# EAGLE board MyDoorSensorpanelized (EAGLE 7.5.0), part 1 of 3
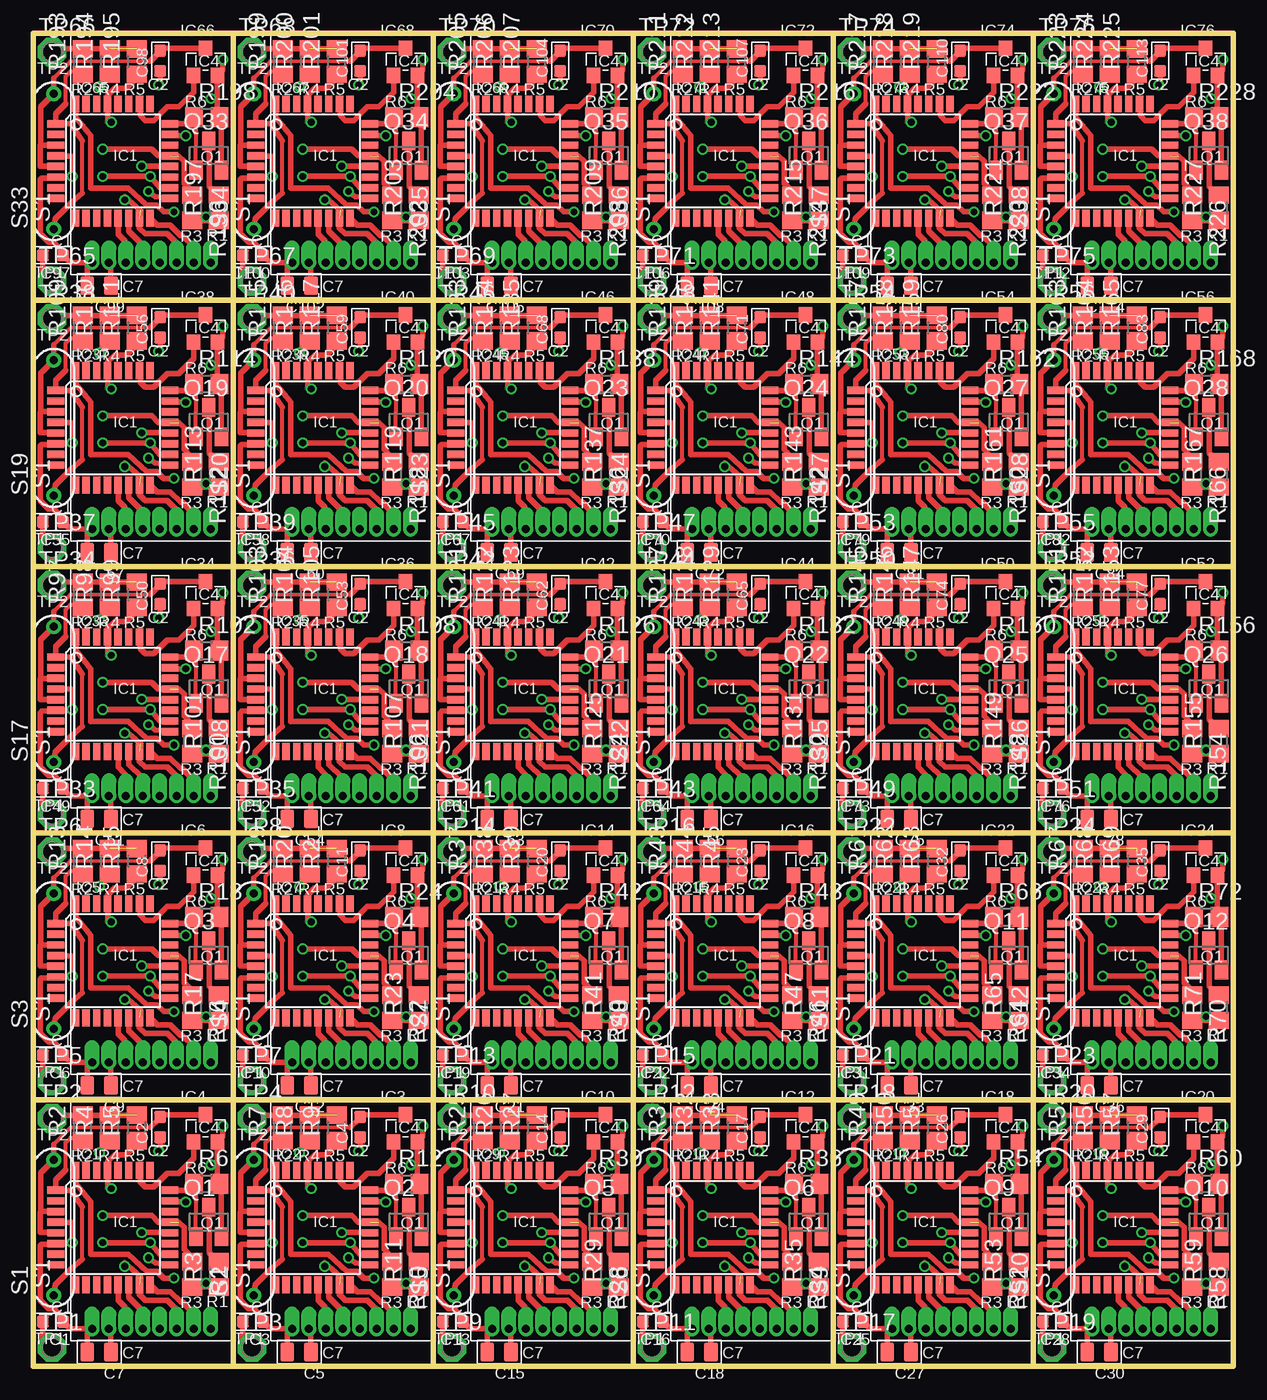
[diagram p0: board, top side]
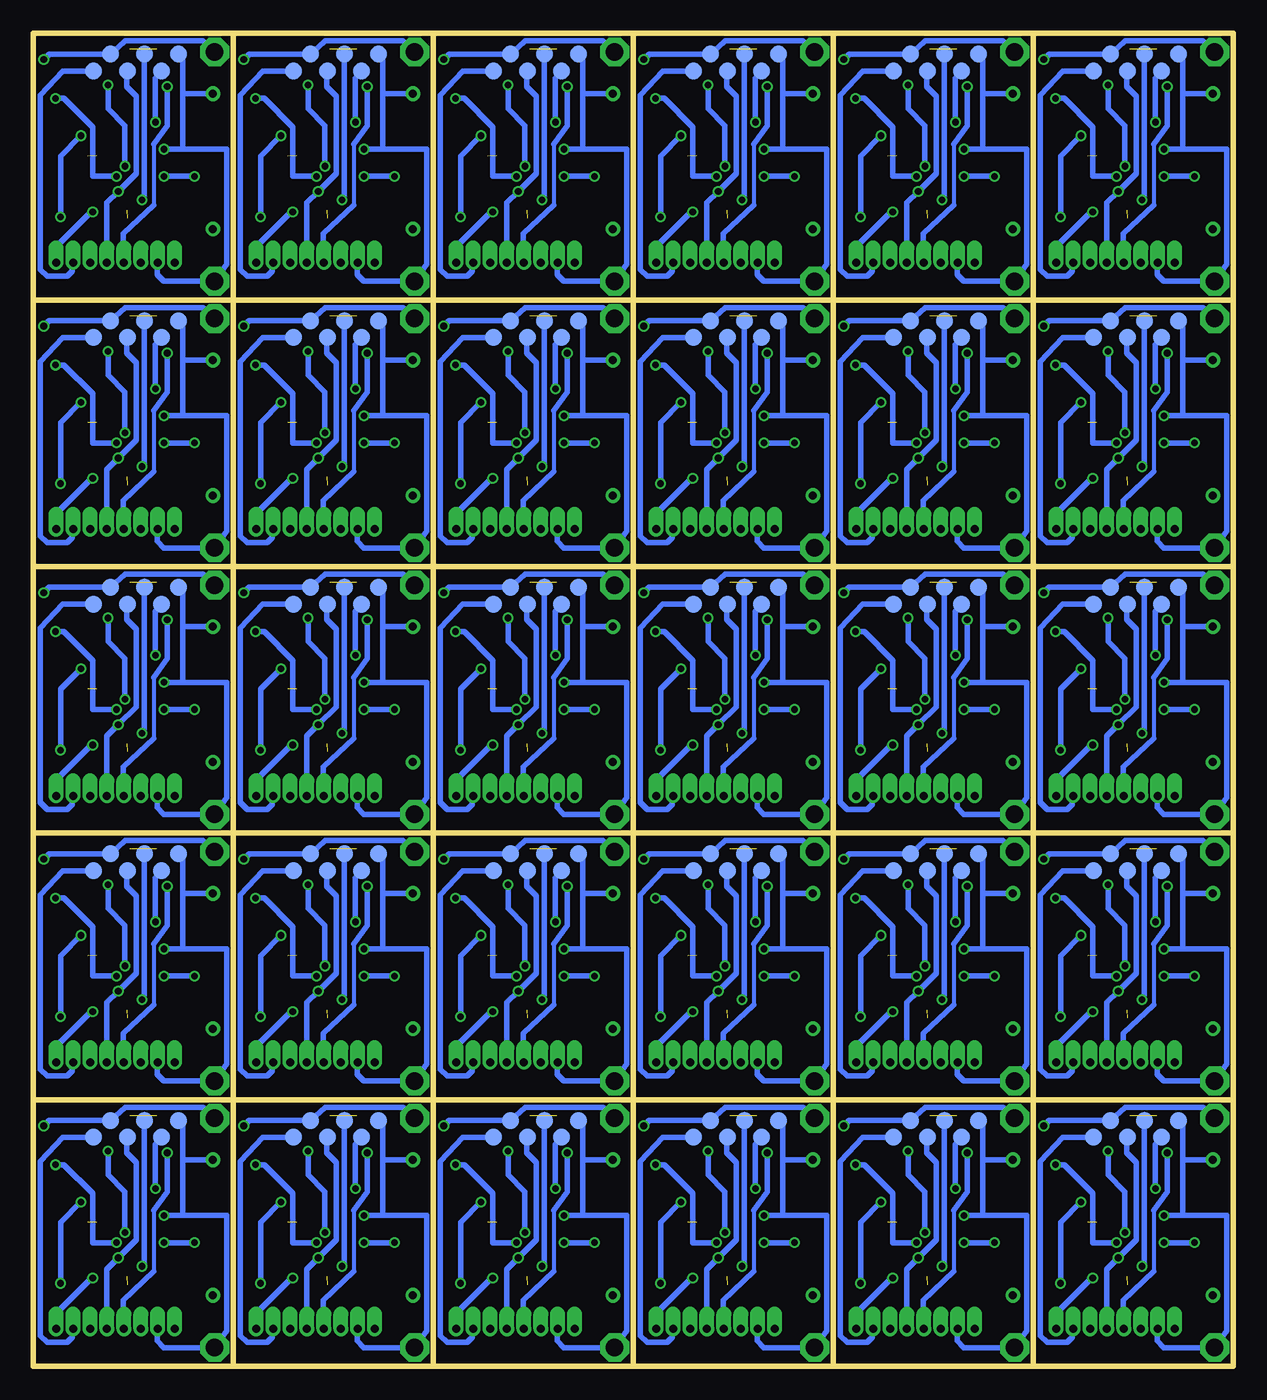
[diagram p1: board, bottom side, seen from below]

Size 90 x 100 mm. Coordinates in mm from the lower left corner, seen from the top.
Outline: 0,0 90,0 90,100 0,100 0,0
Copper layers (1*16): Top 0.035mm / dielectric 1.5mm / Bottom 0.035mm
Design rules "ITEADstudioDRC": minimum track width 6mil, minimum drill 12mil, track to track 6mil, track to pad 6mil, pad to pad 6mil, via to via 6mil, smd to smd 0mil, copper to edge 10mil, drill to drill 10mil, minimum pad ring 10mil, minimum via ring 6mil, stop-mask expansion 2mil, vias tented up to drill 100mil, thermal gap 10mil
Net classes: 0 default: width 0.203 mm; 1 Power: width 0.406 mm
Milling: 71 lines

## Footprints (pad centres in the part's own frame; a part is rotated, then mirrored left to right if it is on the bottom)
C0603 = smd 0.889 x 0.889: 1 -0.762,0; 2 0.762,0
C0805 = smd 1.016 x 1.397: 1 -0.889,0; 2 0.889,0
TQFP32-08 = smd 1.27 x 0.559: 1 -4.293,2.8; 2 -4.293,2; 3 -4.293,1.2; 4 -4.293,0.4; 5 -4.293,-0.4; 6 -4.293,-1.2; 7 -4.293,-2; 8 -4.293,-2.8; 17 4.293,-2.8; 18 4.293,-2; 19 4.293,-1.2; 20 4.293,-0.4; 21 4.293,0.4; 22 4.293,1.2; 23 4.293,2; 24 4.293,2.8 | smd 0.559 x 1.27: 9 -2.8,-4.293; 10 -2,-4.293; 11 -1.2,-4.293; 12 -0.4,-4.293; 13 0.4,-4.293; 14 1.2,-4.293; 15 2,-4.293; 16 2.8,-4.293; 25 2.8,4.293; 26 2,4.293; 27 1.2,4.293; 28 0.4,4.293; 29 -0.4,4.293; 30 -1.2,4.293; 31 -2,4.293; 32 -2.8,4.293
SOT23 = smd 1.016 x 1.143: 1 -0.889,-1.016; 2 0.889,-1.016; 3 0,1.016
SOT23' = smd 1 x 1.4: 1 -0.95,-1.1; 2 0.95,-1.1; 3 0,1.1
R0805 = smd 1.3 x 1.5: 1 -0.95,0; 2 0.95,0
MK6-4 = drill 0.6 pad 1.016: 1 -5.08,0; 2 5.08,0
P1-13 = drill 1.321 pad 2.159 octagon: TP 0,0
PINHD-1X08/NRF24 = drill 0.6 offset: P$1 0,0; P$2 1.27,0; P$3 2.54,0; P$4 3.81,0; P$5 5.08,0; P$6 6.35,0; P$7 7.62,0; P$8 8.89,0
ISP = smd 1.27 x 1.27: P$1 0,0; P$2 1.27,1.27; P$3 2.54,0; P$4 3.81,1.27; P$5 5.08,0; P$6 6.35,1.27

## Placement (x,y rotation side)
C1  100n  [C0603]  1.48,3.34 180 top
C2  100n  [C0603]  9.51,17.94 90 top
C3  100n  [C0603]  16.48,3.34 180 top
C4  100n  [C0603]  24.51,17.94 90 top
C5  4u7  [C0805]  19.93,1.06 180 top
C6  100n  [C0603]  1.48,23.34 180 top
C7  4u7  [C0805]  4.93,1.06 180 top
C8  100n  [C0603]  9.51,37.94 90 top
C9  4u7  [C0805]  4.93,21.06 180 top
C10  100n  [C0603]  16.48,23.34 180 top
C11  100n  [C0603]  24.51,37.94 90 top
C12  4u7  [C0805]  19.93,21.06 180 top
C13  100n  [C0603]  31.48,3.34 180 top
C14  100n  [C0603]  39.51,17.94 90 top
C15  4u7  [C0805]  34.93,1.06 180 top
C16  100n  [C0603]  46.48,3.34 180 top
C17  100n  [C0603]  54.51,17.94 90 top
C18  4u7  [C0805]  49.93,1.06 180 top
C19  100n  [C0603]  31.48,23.34 180 top
C20  100n  [C0603]  39.51,37.94 90 top
C21  4u7  [C0805]  34.93,21.06 180 top
C22  100n  [C0603]  46.48,23.34 180 top
C23  100n  [C0603]  54.51,37.94 90 top
C24  4u7  [C0805]  49.93,21.06 180 top
C25  100n  [C0603]  61.48,3.34 180 top
C26  100n  [C0603]  69.51,17.94 90 top
C27  4u7  [C0805]  64.93,1.06 180 top
C28  100n  [C0603]  76.48,3.34 180 top
C29  100n  [C0603]  84.51,17.94 90 top
C30  4u7  [C0805]  79.93,1.06 180 top
C31  100n  [C0603]  61.48,23.34 180 top
C32  100n  [C0603]  69.51,37.94 90 top
C33  4u7  [C0805]  64.93,21.06 180 top
C34  100n  [C0603]  76.48,23.34 180 top
C35  100n  [C0603]  84.51,37.94 90 top
C36  4u7  [C0805]  79.93,21.06 180 top
C49  100n  [C0603]  1.48,43.34 180 top
C50  100n  [C0603]  9.51,57.94 90 top
C51  4u7  [C0805]  4.93,41.06 180 top
C52  100n  [C0603]  16.48,43.34 180 top
C53  100n  [C0603]  24.51,57.94 90 top
C54  4u7  [C0805]  19.93,41.06 180 top
C55  100n  [C0603]  1.48,63.34 180 top
C56  100n  [C0603]  9.51,77.94 90 top
C57  4u7  [C0805]  4.93,61.06 180 top
C58  100n  [C0603]  16.48,63.34 180 top
C59  100n  [C0603]  24.51,77.94 90 top
C60  4u7  [C0805]  19.93,61.06 180 top
C61  100n  [C0603]  31.48,43.34 180 top
C62  100n  [C0603]  39.51,57.94 90 top
C63  4u7  [C0805]  34.93,41.06 180 top
C64  100n  [C0603]  46.48,43.34 180 top
C65  100n  [C0603]  54.51,57.94 90 top
C66  4u7  [C0805]  49.93,41.06 180 top
C67  100n  [C0603]  31.48,63.34 180 top
C68  100n  [C0603]  39.51,77.94 90 top
C69  4u7  [C0805]  34.93,61.06 180 top
C70  100n  [C0603]  46.48,63.34 180 top
C71  100n  [C0603]  54.51,77.94 90 top
C72  4u7  [C0805]  49.93,61.06 180 top
C73  100n  [C0603]  61.48,43.34 180 top
C74  100n  [C0603]  69.51,57.94 90 top
C75  4u7  [C0805]  64.93,41.06 180 top
C76  100n  [C0603]  76.48,43.34 180 top
C77  100n  [C0603]  84.51,57.94 90 top
C78  4u7  [C0805]  79.93,41.06 180 top
C79  100n  [C0603]  61.48,63.34 180 top
C80  100n  [C0603]  69.51,77.94 90 top
C81  4u7  [C0805]  64.93,61.06 180 top
C82  100n  [C0603]  76.48,63.34 180 top
C83  100n  [C0603]  84.51,77.94 90 top
C84  4u7  [C0805]  79.93,61.06 180 top
C97  100n  [C0603]  1.48,83.34 180 top
C98  100n  [C0603]  9.51,97.94 90 top
C99  4u7  [C0805]  4.93,81.06 180 top
C100  100n  [C0603]  16.48,83.34 180 top
C101  100n  [C0603]  24.51,97.94 90 top
C102  4u7  [C0805]  19.93,81.06 180 top
C103  100n  [C0603]  31.48,83.34 180 top
C104  100n  [C0603]  39.51,97.94 90 top
C105  4u7  [C0805]  34.93,81.06 180 top
C106  100n  [C0603]  46.48,83.34 180 top
C107  100n  [C0603]  54.51,97.94 90 top
C108  4u7  [C0805]  49.93,81.06 180 top
C109  100n  [C0603]  61.48,83.34 180 top
C110  100n  [C0603]  69.51,97.94 90 top
C111  4u7  [C0805]  64.93,81.06 180 top
C112  100n  [C0603]  76.48,83.34 180 top
C113  100n  [C0603]  84.51,97.94 90 top
C114  4u7  [C0805]  79.93,81.06 180 top
IC1  MEGA328P-AU  [TQFP32-08]  5.96,10.41 0 top
IC2  MEGA328P-AU  [TQFP32-08]  20.96,10.41 0 top
IC3  ATSHA204A  [SOT23]  27.91,17.86 0 top
IC4  ATSHA204A  [SOT23]  12.91,17.86 0 top
IC5  MEGA328P-AU  [TQFP32-08]  5.96,30.41 0 top
IC6  ATSHA204A  [SOT23]  12.91,37.86 0 top
IC7  MEGA328P-AU  [TQFP32-08]  20.96,30.41 0 top
IC8  ATSHA204A  [SOT23]  27.91,37.86 0 top
IC9  MEGA328P-AU  [TQFP32-08]  35.96,10.41 0 top
IC10  ATSHA204A  [SOT23]  42.91,17.86 0 top
IC11  MEGA328P-AU  [TQFP32-08]  50.96,10.41 0 top
IC12  ATSHA204A  [SOT23]  57.91,17.86 0 top
IC13  MEGA328P-AU  [TQFP32-08]  35.96,30.41 0 top
IC14  ATSHA204A  [SOT23]  42.91,37.86 0 top
IC15  MEGA328P-AU  [TQFP32-08]  50.96,30.41 0 top
IC16  ATSHA204A  [SOT23]  57.91,37.86 0 top
IC17  MEGA328P-AU  [TQFP32-08]  65.96,10.41 0 top
IC18  ATSHA204A  [SOT23]  72.92,17.86 0 top
IC19  MEGA328P-AU  [TQFP32-08]  80.96,10.41 0 top
IC20  ATSHA204A  [SOT23]  87.92,17.86 0 top
IC21  MEGA328P-AU  [TQFP32-08]  65.96,30.41 0 top
IC22  ATSHA204A  [SOT23]  72.92,37.86 0 top
IC23  MEGA328P-AU  [TQFP32-08]  80.96,30.41 0 top
IC24  ATSHA204A  [SOT23]  87.92,37.86 0 top
IC33  MEGA328P-AU  [TQFP32-08]  5.96,50.41 0 top
IC34  ATSHA204A  [SOT23]  12.91,57.86 0 top
IC35  MEGA328P-AU  [TQFP32-08]  20.96,50.41 0 top
IC36  ATSHA204A  [SOT23]  27.91,57.86 0 top
IC37  MEGA328P-AU  [TQFP32-08]  5.96,70.41 0 top
IC38  ATSHA204A  [SOT23]  12.91,77.86 0 top
IC39  MEGA328P-AU  [TQFP32-08]  20.96,70.41 0 top
IC40  ATSHA204A  [SOT23]  27.91,77.86 0 top
IC41  MEGA328P-AU  [TQFP32-08]  35.96,50.41 0 top
IC42  ATSHA204A  [SOT23]  42.91,57.86 0 top
IC43  MEGA328P-AU  [TQFP32-08]  50.96,50.41 0 top
IC44  ATSHA204A  [SOT23]  57.91,57.86 0 top
IC45  MEGA328P-AU  [TQFP32-08]  35.96,70.41 0 top
IC46  ATSHA204A  [SOT23]  42.91,77.86 0 top
IC47  MEGA328P-AU  [TQFP32-08]  50.96,70.41 0 top
IC48  ATSHA204A  [SOT23]  57.91,77.86 0 top
IC49  MEGA328P-AU  [TQFP32-08]  65.96,50.41 0 top
IC50  ATSHA204A  [SOT23]  72.92,57.86 0 top
IC51  MEGA328P-AU  [TQFP32-08]  80.96,50.41 0 top
IC52  ATSHA204A  [SOT23]  87.92,57.86 0 top
IC53  MEGA328P-AU  [TQFP32-08]  65.96,70.41 0 top
IC54  ATSHA204A  [SOT23]  72.92,77.86 0 top
IC55  MEGA328P-AU  [TQFP32-08]  80.96,70.41 0 top
IC56  ATSHA204A  [SOT23]  87.92,77.86 0 top
IC65  MEGA328P-AU  [TQFP32-08]  5.96,90.41 0 top
IC66  ATSHA204A  [SOT23]  12.91,97.86 0 top
IC67  MEGA328P-AU  [TQFP32-08]  20.96,90.41 0 top
IC68  ATSHA204A  [SOT23]  27.91,97.86 0 top
IC69  MEGA328P-AU  [TQFP32-08]  35.96,90.41 0 top
IC70  ATSHA204A  [SOT23]  42.91,97.86 0 top
IC71  MEGA328P-AU  [TQFP32-08]  50.96,90.41 0 top
IC72  ATSHA204A  [SOT23]  57.91,97.86 0 top
IC73  MEGA328P-AU  [TQFP32-08]  65.96,90.41 0 top
IC74  ATSHA204A  [SOT23]  72.92,97.86 0 top
IC75  MEGA328P-AU  [TQFP32-08]  80.96,90.41 0 top
IC76  ATSHA204A  [SOT23]  87.92,97.86 0 top
Q1  BSS84  [SOT23']  13.15,10.83 0 top
Q2  BSS84  [SOT23']  28.15,10.83 0 top
Q3  BSS84  [SOT23']  13.15,30.83 0 top
Q4  BSS84  [SOT23']  28.15,30.83 0 top
Q5  BSS84  [SOT23']  43.15,10.83 0 top
Q6  BSS84  [SOT23']  58.15,10.83 0 top
Q7  BSS84  [SOT23']  43.15,30.83 0 top
Q8  BSS84  [SOT23']  58.15,30.83 0 top
Q9  BSS84  [SOT23']  73.15,10.83 0 top
Q10  BSS84  [SOT23']  88.15,10.83 0 top
Q11  BSS84  [SOT23']  73.15,30.83 0 top
Q12  BSS84  [SOT23']  88.15,30.83 0 top
Q17  BSS84  [SOT23']  13.15,50.83 0 top
Q18  BSS84  [SOT23']  28.15,50.83 0 top
Q19  BSS84  [SOT23']  13.15,70.83 0 top
Q20  BSS84  [SOT23']  28.15,70.83 0 top
Q21  BSS84  [SOT23']  43.15,50.83 0 top
Q22  BSS84  [SOT23']  58.15,50.83 0 top
Q23  BSS84  [SOT23']  43.15,70.83 0 top
Q24  BSS84  [SOT23']  58.15,70.83 0 top
Q25  BSS84  [SOT23']  73.15,50.83 0 top
Q26  BSS84  [SOT23']  88.15,50.83 0 top
Q27  BSS84  [SOT23']  73.15,70.83 0 top
Q28  BSS84  [SOT23']  88.15,70.83 0 top
Q33  BSS84  [SOT23']  13.15,90.83 0 top
Q34  BSS84  [SOT23']  28.15,90.83 0 top
Q35  BSS84  [SOT23']  43.15,90.83 0 top
Q36  BSS84  [SOT23']  58.15,90.83 0 top
Q37  BSS84  [SOT23']  73.15,90.83 0 top
Q38  BSS84  [SOT23']  88.15,90.83 0 top
R1  1k  [R0805]  11.93,6.9 270 top
R2  1M  [R0805]  3.7,17.89 90 top
R3  2k2  [R0805]  13.9,6.9 90 top
R4  56k  [R0805]  5.73,17.89 90 top
R5  10k  [R0805]  7.77,17.89 90 top
R6  100k  [R0805]  13,13.7 0 top
R7  1M  [R0805]  18.7,17.89 90 top
R8  56k  [R0805]  20.73,17.89 90 top
R9  10k  [R0805]  22.77,17.89 90 top
R10  1k  [R0805]  26.93,6.9 270 top
R11  2k2  [R0805]  28.9,6.9 90 top
R12  100k  [R0805]  28,13.7 0 top
R13  1M  [R0805]  3.7,37.89 90 top
R14  56k  [R0805]  5.73,37.89 90 top
R15  10k  [R0805]  7.77,37.89 90 top
R16  1k  [R0805]  11.93,26.9 270 top
R17  2k2  [R0805]  13.9,26.9 90 top
R18  100k  [R0805]  13,33.7 0 top
R19  1M  [R0805]  18.7,37.89 90 top
R20  56k  [R0805]  20.73,37.89 90 top
R21  10k  [R0805]  22.77,37.89 90 top
R22  1k  [R0805]  26.93,26.9 270 top
R23  2k2  [R0805]  28.9,26.9 90 top
R24  100k  [R0805]  28,33.7 0 top
R25  1M  [R0805]  33.7,17.89 90 top
R26  56k  [R0805]  35.73,17.89 90 top
R27  10k  [R0805]  37.77,17.89 90 top
R28  1k  [R0805]  41.93,6.9 270 top
R29  2k2  [R0805]  43.9,6.9 90 top
R30  100k  [R0805]  43,13.7 0 top
R31  1M  [R0805]  48.7,17.89 90 top
R32  56k  [R0805]  50.73,17.89 90 top
R33  10k  [R0805]  52.77,17.89 90 top
R34  1k  [R0805]  56.93,6.9 270 top
R35  2k2  [R0805]  58.9,6.9 90 top
R36  100k  [R0805]  58,13.7 0 top
R37  1M  [R0805]  33.7,37.89 90 top
R38  56k  [R0805]  35.73,37.89 90 top
R39  10k  [R0805]  37.77,37.89 90 top
R40  1k  [R0805]  41.93,26.9 270 top
R41  2k2  [R0805]  43.9,26.9 90 top
R42  100k  [R0805]  43,33.7 0 top
R43  1M  [R0805]  48.7,37.89 90 top
R44  56k  [R0805]  50.73,37.89 90 top
R45  10k  [R0805]  52.77,37.89 90 top
R46  1k  [R0805]  56.93,26.9 270 top
R47  2k2  [R0805]  58.9,26.9 90 top
R48  100k  [R0805]  58,33.7 0 top
R49  1M  [R0805]  63.7,17.89 90 top
R50  56k  [R0805]  65.73,17.89 90 top
R51  10k  [R0805]  67.77,17.89 90 top
R52  1k  [R0805]  71.93,6.9 270 top
R53  2k2  [R0805]  73.9,6.9 90 top
R54  100k  [R0805]  73,13.7 0 top
R55  1M  [R0805]  78.7,17.89 90 top
R56  56k  [R0805]  80.73,17.89 90 top
R57  10k  [R0805]  82.77,17.89 90 top
R58  1k  [R0805]  86.93,6.9 270 top
R59  2k2  [R0805]  88.9,6.9 90 top
R60  100k  [R0805]  88,13.7 0 top
R61  1M  [R0805]  63.7,37.89 90 top
R62  56k  [R0805]  65.73,37.89 90 top
R63  10k  [R0805]  67.77,37.89 90 top
R64  1k  [R0805]  71.93,26.9 270 top
R65  2k2  [R0805]  73.9,26.9 90 top
R66  100k  [R0805]  73,33.7 0 top
R67  1M  [R0805]  78.7,37.89 90 top
R68  56k  [R0805]  80.73,37.89 90 top
R69  10k  [R0805]  82.77,37.89 90 top
R70  1k  [R0805]  86.93,26.9 270 top
R71  2k2  [R0805]  88.9,26.9 90 top
R72  100k  [R0805]  88,33.7 0 top
R97  1M  [R0805]  3.7,57.89 90 top
R98  56k  [R0805]  5.73,57.89 90 top
R99  10k  [R0805]  7.77,57.89 90 top
R100  1k  [R0805]  11.93,46.9 270 top
R101  2k2  [R0805]  13.9,46.9 90 top
R102  100k  [R0805]  13,53.7 0 top
R103  1M  [R0805]  18.7,57.89 90 top
R104  56k  [R0805]  20.73,57.89 90 top
R105  10k  [R0805]  22.77,57.89 90 top
R106  1k  [R0805]  26.93,46.9 270 top
R107  2k2  [R0805]  28.9,46.9 90 top
R108  100k  [R0805]  28,53.7 0 top
R109  1M  [R0805]  3.7,77.89 90 top
R110  56k  [R0805]  5.73,77.89 90 top
R111  10k  [R0805]  7.77,77.89 90 top
R112  1k  [R0805]  11.93,66.9 270 top
R113  2k2  [R0805]  13.9,66.9 90 top
R114  100k  [R0805]  13,73.7 0 top
R115  1M  [R0805]  18.7,77.89 90 top
R116  56k  [R0805]  20.73,77.89 90 top
R117  10k  [R0805]  22.77,77.89 90 top
R118  1k  [R0805]  26.93,66.9 270 top
R119  2k2  [R0805]  28.9,66.9 90 top
R120  100k  [R0805]  28,73.7 0 top
R121  1M  [R0805]  33.7,57.89 90 top
R122  56k  [R0805]  35.73,57.89 90 top
R123  10k  [R0805]  37.77,57.89 90 top
R124  1k  [R0805]  41.93,46.9 270 top
R125  2k2  [R0805]  43.9,46.9 90 top
R126  100k  [R0805]  43,53.7 0 top
R127  1M  [R0805]  48.7,57.89 90 top
R128  56k  [R0805]  50.73,57.89 90 top
R129  10k  [R0805]  52.77,57.89 90 top
R130  1k  [R0805]  56.93,46.9 270 top
R131  2k2  [R0805]  58.9,46.9 90 top
R132  100k  [R0805]  58,53.7 0 top
R133  1M  [R0805]  33.7,77.89 90 top
R134  56k  [R0805]  35.73,77.89 90 top
R135  10k  [R0805]  37.77,77.89 90 top
R136  1k  [R0805]  41.93,66.9 270 top
R137  2k2  [R0805]  43.9,66.9 90 top
R138  100k  [R0805]  43,73.7 0 top
R139  1M  [R0805]  48.7,77.89 90 top
R140  56k  [R0805]  50.73,77.89 90 top
R141  10k  [R0805]  52.77,77.89 90 top
R142  1k  [R0805]  56.93,66.9 270 top
R143  2k2  [R0805]  58.9,66.9 90 top
R144  100k  [R0805]  58,73.7 0 top
R145  1M  [R0805]  63.7,57.89 90 top
R146  56k  [R0805]  65.73,57.89 90 top
R147  10k  [R0805]  67.77,57.89 90 top
R148  1k  [R0805]  71.93,46.9 270 top
R149  2k2  [R0805]  73.9,46.9 90 top
R150  100k  [R0805]  73,53.7 0 top
R151  1M  [R0805]  78.7,57.89 90 top
R152  56k  [R0805]  80.73,57.89 90 top
R153  10k  [R0805]  82.77,57.89 90 top
R154  1k  [R0805]  86.93,46.9 270 top
R155  2k2  [R0805]  88.9,46.9 90 top
R156  100k  [R0805]  88,53.7 0 top
R157  1M  [R0805]  63.7,77.89 90 top
R158  56k  [R0805]  65.73,77.89 90 top
R159  10k  [R0805]  67.77,77.89 90 top
R160  1k  [R0805]  71.93,66.9 270 top
R161  2k2  [R0805]  73.9,66.9 90 top
R162  100k  [R0805]  73,73.7 0 top
R163  1M  [R0805]  78.7,77.89 90 top
R164  56k  [R0805]  80.73,77.89 90 top
R165  10k  [R0805]  82.77,77.89 90 top
R166  1k  [R0805]  86.93,66.9 270 top
R167  2k2  [R0805]  88.9,66.9 90 top
R168  100k  [R0805]  88,73.7 0 top
R193  1M  [R0805]  3.7,97.89 90 top
R194  56k  [R0805]  5.73,97.89 90 top
R195  10k  [R0805]  7.77,97.89 90 top
R196  1k  [R0805]  11.93,86.9 270 top
R197  2k2  [R0805]  13.9,86.9 90 top
R198  100k  [R0805]  13,93.7 0 top
R199  1M  [R0805]  18.7,97.89 90 top
R200  56k  [R0805]  20.73,97.89 90 top
R201  10k  [R0805]  22.77,97.89 90 top
R202  1k  [R0805]  26.93,86.9 270 top
R203  2k2  [R0805]  28.9,86.9 90 top
R204  100k  [R0805]  28,93.7 0 top
R205  1M  [R0805]  33.7,97.89 90 top
R206  56k  [R0805]  35.73,97.89 90 top
R207  10k  [R0805]  37.77,97.89 90 top
R208  1k  [R0805]  41.93,86.9 270 top
R209  2k2  [R0805]  43.9,86.9 90 top
R210  100k  [R0805]  43,93.7 0 top
R211  1M  [R0805]  48.7,97.89 90 top
R212  56k  [R0805]  50.73,97.89 90 top
R213  10k  [R0805]  52.77,97.89 90 top
R214  1k  [R0805]  56.93,86.9 270 top
R215  2k2  [R0805]  58.9,86.9 90 top
R216  100k  [R0805]  58,93.7 0 top
R217  1M  [R0805]  63.7,97.89 90 top
R218  56k  [R0805]  65.73,97.89 90 top
R219  10k  [R0805]  67.77,97.89 90 top
R220  1k  [R0805]  71.93,86.9 270 top
R221  2k2  [R0805]  73.9,86.9 90 top
R222  100k  [R0805]  73,93.7 0 top
R223  1M  [R0805]  78.7,97.89 90 top
R224  56k  [R0805]  80.73,97.89 90 top
R225  10k  [R0805]  82.77,97.89 90 top
R226  1k  [R0805]  86.93,86.9 270 top
R227  2k2  [R0805]  88.9,86.9 90 top
R228  100k  [R0805]  88,93.7 0 top
S1  REED-SWITCH-MK6-4  [MK6-4]  1.53,10.4 90 top
S2  REED-SWITCH-MK6-4  [MK6-4]  16.53,10.4 90 top
S3  REED-SWITCH-MK6-4  [MK6-4]  1.53,30.4 90 top
S4  REED-SWITCH-MK6-4  [MK6-4]  16.53,30.4 90 top
S5  REED-SWITCH-MK6-4  [MK6-4]  31.53,10.4 90 top
S6  REED-SWITCH-MK6-4  [MK6-4]  46.53,10.4 90 top
S7  REED-SWITCH-MK6-4  [MK6-4]  31.53,30.4 90 top
S8  REED-SWITCH-MK6-4  [MK6-4]  46.53,30.4 90 top
S9  REED-SWITCH-MK6-4  [MK6-4]  61.53,10.4 90 top
S10  REED-SWITCH-MK6-4  [MK6-4]  76.53,10.4 90 top
S11  REED-SWITCH-MK6-4  [MK6-4]  61.53,30.4 90 top
S12  REED-SWITCH-MK6-4  [MK6-4]  76.53,30.4 90 top
S17  REED-SWITCH-MK6-4  [MK6-4]  1.53,50.4 90 top
S18  REED-SWITCH-MK6-4  [MK6-4]  16.53,50.4 90 top
S19  REED-SWITCH-MK6-4  [MK6-4]  1.53,70.4 90 top
S20  REED-SWITCH-MK6-4  [MK6-4]  16.53,70.4 90 top
S21  REED-SWITCH-MK6-4  [MK6-4]  31.53,50.4 90 top
S22  REED-SWITCH-MK6-4  [MK6-4]  46.53,50.4 90 top
S23  REED-SWITCH-MK6-4  [MK6-4]  31.53,70.4 90 top
S24  REED-SWITCH-MK6-4  [MK6-4]  46.53,70.4 90 top
S25  REED-SWITCH-MK6-4  [MK6-4]  61.53,50.4 90 top
S26  REED-SWITCH-MK6-4  [MK6-4]  76.53,50.4 90 top
S27  REED-SWITCH-MK6-4  [MK6-4]  61.53,70.4 90 top
S28  REED-SWITCH-MK6-4  [MK6-4]  76.53,70.4 90 top
S33  REED-SWITCH-MK6-4  [MK6-4]  1.53,90.4 90 top
S34  REED-SWITCH-MK6-4  [MK6-4]  16.53,90.4 90 top
S35  REED-SWITCH-MK6-4  [MK6-4]  31.53,90.4 90 top
S36  REED-SWITCH-MK6-4  [MK6-4]  46.53,90.4 90 top
S37  REED-SWITCH-MK6-4  [MK6-4]  61.53,90.4 90 top
S38  REED-SWITCH-MK6-4  [MK6-4]  76.53,90.4 90 top
TP1  TPPAD1-13  [P1-13]  1.4,1.4 0 top
TP2  TPPAD1-13  [P1-13]  1.4,18.6 0 top
TP3  TPPAD1-13  [P1-13]  16.4,1.4 0 top
TP4  TPPAD1-13  [P1-13]  16.4,18.6 0 top
TP5  TPPAD1-13  [P1-13]  1.4,21.4 0 top
TP6  TPPAD1-13  [P1-13]  1.4,38.6 0 top
TP7  TPPAD1-13  [P1-13]  16.4,21.4 0 top
TP8  TPPAD1-13  [P1-13]  16.4,38.6 0 top
TP9  TPPAD1-13  [P1-13]  31.4,1.4 0 top
TP10  TPPAD1-13  [P1-13]  31.4,18.6 0 top
TP11  TPPAD1-13  [P1-13]  46.4,1.4 0 top
TP12  TPPAD1-13  [P1-13]  46.4,18.6 0 top
TP13  TPPAD1-13  [P1-13]  31.4,21.4 0 top
TP14  TPPAD1-13  [P1-13]  31.4,38.6 0 top
TP15  TPPAD1-13  [P1-13]  46.4,21.4 0 top
TP16  TPPAD1-13  [P1-13]  46.4,38.6 0 top
TP17  TPPAD1-13  [P1-13]  61.4,1.4 0 top
TP18  TPPAD1-13  [P1-13]  61.4,18.6 0 top
TP19  TPPAD1-13  [P1-13]  76.4,1.4 0 top
TP20  TPPAD1-13  [P1-13]  76.4,18.6 0 top
TP21  TPPAD1-13  [P1-13]  61.4,21.4 0 top
TP22  TPPAD1-13  [P1-13]  61.4,38.6 0 top
TP23  TPPAD1-13  [P1-13]  76.4,21.4 0 top
TP24  TPPAD1-13  [P1-13]  76.4,38.6 0 top
TP33  TPPAD1-13  [P1-13]  1.4,41.4 0 top
TP34  TPPAD1-13  [P1-13]  1.4,58.6 0 top
TP35  TPPAD1-13  [P1-13]  16.4,41.4 0 top
TP36  TPPAD1-13  [P1-13]  16.4,58.6 0 top
TP37  TPPAD1-13  [P1-13]  1.4,61.4 0 top
TP38  TPPAD1-13  [P1-13]  1.4,78.6 0 top
TP39  TPPAD1-13  [P1-13]  16.4,61.4 0 top
TP40  TPPAD1-13  [P1-13]  16.4,78.6 0 top
TP41  TPPAD1-13  [P1-13]  31.4,41.4 0 top
TP42  TPPAD1-13  [P1-13]  31.4,58.6 0 top
TP43  TPPAD1-13  [P1-13]  46.4,41.4 0 top
TP44  TPPAD1-13  [P1-13]  46.4,58.6 0 top
TP45  TPPAD1-13  [P1-13]  31.4,61.4 0 top
TP46  TPPAD1-13  [P1-13]  31.4,78.6 0 top
TP47  TPPAD1-13  [P1-13]  46.4,61.4 0 top
TP48  TPPAD1-13  [P1-13]  46.4,78.6 0 top
TP49  TPPAD1-13  [P1-13]  61.4,41.4 0 top
TP50  TPPAD1-13  [P1-13]  61.4,58.6 0 top
TP51  TPPAD1-13  [P1-13]  76.4,41.4 0 top
TP52  TPPAD1-13  [P1-13]  76.4,58.6 0 top
TP53  TPPAD1-13  [P1-13]  61.4,61.4 0 top
TP54  TPPAD1-13  [P1-13]  61.4,78.6 0 top
TP55  TPPAD1-13  [P1-13]  76.4,61.4 0 top
TP56  TPPAD1-13  [P1-13]  76.4,78.6 0 top
TP65  TPPAD1-13  [P1-13]  1.4,81.4 0 top
TP66  TPPAD1-13  [P1-13]  1.4,98.6 0 top
TP67  TPPAD1-13  [P1-13]  16.4,81.4 0 top
TP68  TPPAD1-13  [P1-13]  16.4,98.6 0 top
TP69  TPPAD1-13  [P1-13]  31.4,81.4 0 top
TP70  TPPAD1-13  [P1-13]  31.4,98.6 0 top
TP71  TPPAD1-13  [P1-13]  46.4,81.4 0 top
TP72  TPPAD1-13  [P1-13]  46.4,98.6 0 top
TP73  TPPAD1-13  [P1-13]  61.4,81.4 0 top
TP74  TPPAD1-13  [P1-13]  61.4,98.6 0 top
TP75  TPPAD1-13  [P1-13]  76.4,81.4 0 top
TP76  TPPAD1-13  [P1-13]  76.4,98.6 0 top
U$1  NRF24  [PINHD-1X08/NRF24]  4.4,2.8 0 top
U$2  ISP  [ISP]  10.47,17.17 0 bottom
U$3  NRF24  [PINHD-1X08/NRF24]  19.4,2.8 0 top
U$4  ISP  [ISP]  25.47,17.17 0 bottom
U$5  NRF24  [PINHD-1X08/NRF24]  4.4,22.8 0 top
U$6  ISP  [ISP]  10.47,37.17 0 bottom
U$7  NRF24  [PINHD-1X08/NRF24]  19.4,22.8 0 top
U$8  ISP  [ISP]  25.47,37.17 0 bottom
U$9  NRF24  [PINHD-1X08/NRF24]  34.4,2.8 0 top
U$10  ISP  [ISP]  40.47,17.17 0 bottom
U$11  NRF24  [PINHD-1X08/NRF24]  49.4,2.8 0 top
U$12  ISP  [ISP]  55.47,17.17 0 bottom
U$13  NRF24  [PINHD-1X08/NRF24]  34.4,22.8 0 top
U$14  ISP  [ISP]  40.47,37.17 0 bottom
U$15  NRF24  [PINHD-1X08/NRF24]  49.4,22.8 0 top
U$16  ISP  [ISP]  55.47,37.17 0 bottom
U$17  NRF24  [PINHD-1X08/NRF24]  64.4,2.8 0 top
U$18  ISP  [ISP]  70.47,17.17 0 bottom
U$19  NRF24  [PINHD-1X08/NRF24]  79.4,2.8 0 top
U$20  ISP  [ISP]  85.47,17.17 0 bottom
U$21  NRF24  [PINHD-1X08/NRF24]  64.4,22.8 0 top
U$22  ISP  [ISP]  70.47,37.17 0 bottom
U$23  NRF24  [PINHD-1X08/NRF24]  79.4,22.8 0 top
U$24  ISP  [ISP]  85.47,37.17 0 bottom
U$33  NRF24  [PINHD-1X08/NRF24]  4.4,42.8 0 top
U$34  ISP  [ISP]  10.47,57.17 0 bottom
U$35  NRF24  [PINHD-1X08/NRF24]  19.4,42.8 0 top
U$36  ISP  [ISP]  25.47,57.17 0 bottom
U$37  NRF24  [PINHD-1X08/NRF24]  4.4,62.8 0 top
U$38  ISP  [ISP]  10.47,77.17 0 bottom
U$39  NRF24  [PINHD-1X08/NRF24]  19.4,62.8 0 top
U$40  ISP  [ISP]  25.47,77.17 0 bottom
U$41  NRF24  [PINHD-1X08/NRF24]  34.4,42.8 0 top
U$42  ISP  [ISP]  40.47,57.17 0 bottom
U$43  NRF24  [PINHD-1X08/NRF24]  49.4,42.8 0 top
U$44  ISP  [ISP]  55.47,57.17 0 bottom
U$45  NRF24  [PINHD-1X08/NRF24]  34.4,62.8 0 top
U$46  ISP  [ISP]  40.47,77.17 0 bottom
U$47  NRF24  [PINHD-1X08/NRF24]  49.4,62.8 0 top
U$48  ISP  [ISP]  55.47,77.17 0 bottom
U$49  NRF24  [PINHD-1X08/NRF24]  64.4,42.8 0 top
U$50  ISP  [ISP]  70.47,57.17 0 bottom
U$51  NRF24  [PINHD-1X08/NRF24]  79.4,42.8 0 top
U$52  ISP  [ISP]  85.47,57.17 0 bottom
U$53  NRF24  [PINHD-1X08/NRF24]  64.4,62.8 0 top
U$54  ISP  [ISP]  70.47,77.17 0 bottom
U$55  NRF24  [PINHD-1X08/NRF24]  79.4,62.8 0 top
U$56  ISP  [ISP]  85.47,77.17 0 bottom
U$65  NRF24  [PINHD-1X08/NRF24]  4.4,82.8 0 top
U$66  ISP  [ISP]  10.47,97.17 0 bottom
U$67  NRF24  [PINHD-1X08/NRF24]  19.4,82.8 0 top
U$68  ISP  [ISP]  25.47,97.17 0 bottom
U$69  NRF24  [PINHD-1X08/NRF24]  34.4,82.8 0 top
U$70  ISP  [ISP]  40.47,97.17 0 bottom
U$71  NRF24  [PINHD-1X08/NRF24]  49.4,82.8 0 top
U$72  ISP  [ISP]  55.47,97.17 0 bottom
U$73  NRF24  [PINHD-1X08/NRF24]  64.4,82.8 0 top
U$74  ISP  [ISP]  70.47,97.17 0 bottom
U$75  NRF24  [PINHD-1X08/NRF24]  79.4,82.8 0 top
U$76  ISP  [ISP]  85.47,97.17 0 bottom

## Library data of the parts
C1-C36 C49-C84 C97-C114 = Discrete
IC1 IC2 IC5 IC7 IC9 IC11 IC13 IC15 IC17 IC19 IC21 IC23 IC33 IC35 IC37 IC39 IC41 IC43 IC45 IC47 IC49 IC51 IC53 IC55 IC65 IC67 IC69 IC71 IC73 IC75 = avr-7
IC3 IC4 IC6 IC8 IC10 IC12 IC14 IC16 IC18 IC20 IC22 IC24 IC34 IC36 IC38 IC40 IC42 IC44 IC46 IC48 IC50 IC52 IC54 IC56 IC66 IC68 IC70 IC72 IC74 IC76 = Sensor
Q1-Q12 Q17-Q28 Q33-Q38 = transistor-small-signal
R1-R72 R97-R168 R193-R228 = resistor
S1-S12 S17-S28 S33-S38 = switch-reed; OC_FARNELL: unknown
TP1-TP24 TP33-TP56 TP65-TP76 = testpad
U$1-U$24 U$33-U$56 U$65-U$76 = mylbr

## Nets
A0: IC1.23 R1.2 R3.1
A1: IC1.24 Q1.1 R6.1
A2: IC1.25
A3: IC1.26 IC4.1
A4: IC2.23 R10.2 R11.1
A5: IC2.24 Q2.1 R12.1
A6: IC2.25
A7: IC2.26 IC3.1
A8: IC5.23 R16.2 R17.1
A9: IC5.24 Q3.1 R18.1
A10: IC5.25
A11: IC5.26 IC6.1
A12: IC7.23 R22.2 R23.1
A13: IC7.24 Q4.1 R24.1
A14: IC7.25
A15: IC7.26 IC8.1
A16: IC9.23 R28.2 R29.1
A17: IC9.24 Q5.1 R30.1
A18: IC9.25
A19: IC9.26 IC10.1
A20: IC11.23 R34.2 R35.1
A21: IC11.24 Q6.1 R36.1
A22: IC11.25
A23: IC11.26 IC12.1
A24: IC13.23 R40.2 R41.1
A25: IC13.24 Q7.1 R42.1
A26: IC13.25
A27: IC13.26 IC14.1
A28: IC15.23 R46.2 R47.1
A29: IC15.24 Q8.1 R48.1
A30: IC15.25
A31: IC15.26 IC16.1
A32: IC17.23 R52.2 R53.1
A33: IC17.24 Q9.1 R54.1
A34: IC17.25
A35: IC17.26 IC18.1
A36: IC19.23 R58.2 R59.1
A37: IC19.24 Q10.1 R60.1
A38: IC19.25
A39: IC19.26 IC20.1
A40: IC21.23 R64.2 R65.1
A41: IC21.24 Q11.1 R66.1
A42: IC21.25
A43: IC21.26 IC22.1
A44: IC23.23 R70.2 R71.1
A45: IC23.24 Q12.1 R72.1
A46: IC23.25
A47: IC23.26 IC24.1
A64: IC33.23 R100.2 R101.1
A65: IC33.24 Q17.1 R102.1
A66: IC33.25
A67: IC33.26 IC34.1
A68: IC35.23 R106.2 R107.1
A69: IC35.24 Q18.1 R108.1
A70: IC35.25
A71: IC35.26 IC36.1
A72: IC37.23 R112.2 R113.1
A73: IC37.24 Q19.1 R114.1
A74: IC37.25
A75: IC37.26 IC38.1
A76: IC39.23 R118.2 R119.1
A77: IC39.24 Q20.1 R120.1
A78: IC39.25
A79: IC39.26 IC40.1
A80: IC41.23 R124.2 R125.1
A81: IC41.24 Q21.1 R126.1
A82: IC41.25
A83: IC41.26 IC42.1
A84: IC43.23 R130.2 R131.1
A85: IC43.24 Q22.1 R132.1
A86: IC43.25
A87: IC43.26 IC44.1
A88: IC45.23 R136.2 R137.1
A89: IC45.24 Q23.1 R138.1
A90: IC45.25
A91: IC45.26 IC46.1
A92: IC47.23 R142.2 R143.1
A93: IC47.24 Q24.1 R144.1
A94: IC47.25
A95: IC47.26 IC48.1
A96: IC49.23 R148.2 R149.1
A97: IC49.24 Q25.1 R150.1
A98: IC49.25
A99: IC49.26 IC50.1
A100: IC51.23 R154.2 R155.1
A101: IC51.24 Q26.1 R156.1
A102: IC51.25
A103: IC51.26 IC52.1
A104: IC53.23 R160.2 R161.1
A105: IC53.24 Q27.1 R162.1
A106: IC53.25
A107: IC53.26 IC54.1
A108: IC55.23 R166.2 R167.1
A109: IC55.24 Q28.1 R168.1
A110: IC55.25
A111: IC55.26 IC56.1
A128: IC65.23 R196.2 R197.1
A129: IC65.24 Q33.1 R198.1
A130: IC65.25
A131: IC65.26 IC66.1
A132: IC67.23 R202.2 R203.1
A133: IC67.24 Q34.1 R204.1
A134: IC67.25
A135: IC67.26 IC68.1
A136: IC69.23 R208.2 R209.1
A137: IC69.24 Q35.1 R210.1
A138: IC69.25
A139: IC69.26 IC70.1
A140: IC71.23 R214.2 R215.1
A141: IC71.24 Q36.1 R216.1
A142: IC71.25
A143: IC71.26 IC72.1
A144: IC73.23 R220.2 R221.1
A145: IC73.24 Q37.1 R222.1
A146: IC73.25
A147: IC73.26 IC74.1
A148: IC75.23 R226.2 R227.1
A149: IC75.24 Q38.1 R228.1
A150: IC75.25
A151: IC75.26 IC76.1
D1: IC2.2
D2: IC1.32 U$1.P$8
D3: IC1.1 R2.1 S1.1
D4: IC1.2
D5: IC1.9
D6: IC1.10
D7: IC1.11
D8: IC1.12
D9: IC1.13 U$1.P$3
D10: IC1.14 R4.1 U$1.P$4
D11: IC2.14 R8.1 U$3.P$4
D12: IC2.13 U$3.P$3
D13: IC2.12
D14: IC2.11
D15: IC2.32 U$3.P$8
D16: IC2.1 R7.1 S2.1
D17: IC2.10
D18: IC2.9
D19: IC5.2
D20: IC5.14 R14.1 U$5.P$4
D21: IC5.13 U$5.P$3
D22: IC5.12
D23: IC5.11
D24: IC5.32 U$5.P$8
D25: IC5.1 R13.1 S3.1
D26: IC5.10
D27: IC5.9
D28: IC7.2
D29: IC7.14 R20.1 U$7.P$4
D30: IC7.13 U$7.P$3
D31: IC7.12
D32: IC7.11
D33: IC7.32 U$7.P$8
D34: IC7.1 R19.1 S4.1
D35: IC7.10
D36: IC7.9
D37: IC9.2
D38: IC9.14 R26.1 U$9.P$4
D39: IC9.13 U$9.P$3
D40: IC9.12
D41: IC9.11
D42: IC9.32 U$9.P$8
D43: IC9.1 R25.1 S5.1
D44: IC9.10
D45: IC9.9
D46: IC11.2
D47: IC11.14 R32.1 U$11.P$4
D48: IC11.13 U$11.P$3
D49: IC11.12
D50: IC11.11
D51: IC11.32 U$11.P$8
D52: IC11.1 R31.1 S6.1
D53: IC11.10
D54: IC11.9
D55: IC13.2
D56: IC13.14 R38.1 U$13.P$4
D57: IC13.13 U$13.P$3
D58: IC13.12
D59: IC13.11
D60: IC13.32 U$13.P$8
D61: IC13.1 R37.1 S7.1
D62: IC13.10
D63: IC13.9
D64: IC15.2
D65: IC15.14 R44.1 U$15.P$4
D66: IC15.13 U$15.P$3
D67: IC15.12
D68: IC15.11
D69: IC15.32 U$15.P$8
D70: IC15.1 R43.1 S8.1
D71: IC15.10
D72: IC15.9
D73: IC17.2
D74: IC17.14 R50.1 U$17.P$4
D75: IC17.13 U$17.P$3
D76: IC17.12
D77: IC17.11
D78: IC17.32 U$17.P$8
D79: IC17.1 R49.1 S9.1
D80: IC17.10
D81: IC17.9
D82: IC19.2
D83: IC19.14 R56.1 U$19.P$4
D84: IC19.13 U$19.P$3
D85: IC19.12
D86: IC19.11
D87: IC19.32 U$19.P$8
D88: IC19.1 R55.1 S10.1
D89: IC19.10
D90: IC19.9
D91: IC21.2
D92: IC21.14 R62.1 U$21.P$4
D93: IC21.13 U$21.P$3
D94: IC21.12
D95: IC21.11
D96: IC21.32 U$21.P$8
D97: IC21.1 R61.1 S11.1
D98: IC21.10
D99: IC21.9
D100: IC23.2
D101: IC23.14 R68.1 U$23.P$4
D102: IC23.13 U$23.P$3
D103: IC23.12
D104: IC23.11
D105: IC23.32 U$23.P$8
D106: IC23.1 R67.1 S12.1
D107: IC23.10
D108: IC23.9
D145: IC33.2
D146: IC33.14 R98.1 U$33.P$4
D147: IC33.13 U$33.P$3
D148: IC33.12
D149: IC33.11
D150: IC33.32 U$33.P$8
D151: IC33.1 R97.1 S17.1
D152: IC33.10
D153: IC33.9
D154: IC35.2
D155: IC35.14 R104.1 U$35.P$4
D156: IC35.13 U$35.P$3
D157: IC35.12
D158: IC35.11
D159: IC35.32 U$35.P$8
D160: IC35.1 R103.1 S18.1
D161: IC35.10
D162: IC35.9
D163: IC37.2
D164: IC37.14 R110.1 U$37.P$4
D165: IC37.13 U$37.P$3
D166: IC37.12
D167: IC37.11
D168: IC37.32 U$37.P$8
D169: IC37.1 R109.1 S19.1
D170: IC37.10
D171: IC37.9
D172: IC39.2
D173: IC39.14 R116.1 U$39.P$4
D174: IC39.13 U$39.P$3
D175: IC39.12
D176: IC39.11
D177: IC39.32 U$39.P$8
D178: IC39.1 R115.1 S20.1
D179: IC39.10
D180: IC39.9
D181: IC41.2
D182: IC41.14 R122.1 U$41.P$4
D183: IC41.13 U$41.P$3
D184: IC41.12
D185: IC41.11
D186: IC41.32 U$41.P$8
D187: IC41.1 R121.1 S21.1
D188: IC41.10
D189: IC41.9
D190: IC43.2
D191: IC43.14 R128.1 U$43.P$4
D192: IC43.13 U$43.P$3
D193: IC43.12
D194: IC43.11
D195: IC43.32 U$43.P$8
D196: IC43.1 R127.1 S22.1
D197: IC43.10
D198: IC43.9
D199: IC45.2
D200: IC45.14 R134.1 U$45.P$4
D201: IC45.13 U$45.P$3
D202: IC45.12
D203: IC45.11
D204: IC45.32 U$45.P$8
D205: IC45.1 R133.1 S23.1
D206: IC45.10
D207: IC45.9
D208: IC47.2
D209: IC47.14 R140.1 U$47.P$4
D210: IC47.13 U$47.P$3
D211: IC47.12
D212: IC47.11
D213: IC47.32 U$47.P$8
D214: IC47.1 R139.1 S24.1
D215: IC47.10
D216: IC47.9
D217: IC49.2
D218: IC49.14 R146.1 U$49.P$4
D219: IC49.13 U$49.P$3
D220: IC49.12
D221: IC49.11
D222: IC49.32 U$49.P$8
D223: IC49.1 R145.1 S25.1
D224: IC49.10
D225: IC49.9
D226: IC51.2
D227: IC51.14 R152.1 U$51.P$4
D228: IC51.13 U$51.P$3
D229: IC51.12
D230: IC51.11
D231: IC51.32 U$51.P$8
D232: IC51.1 R151.1 S26.1
D233: IC51.10
D234: IC51.9
D235: IC53.2
D236: IC53.14 R158.1 U$53.P$4
D237: IC53.13 U$53.P$3
D238: IC53.12
D239: IC53.11
D240: IC53.32 U$53.P$8
D241: IC53.1 R157.1 S27.1
D242: IC53.10
D243: IC53.9
D244: IC55.2
D245: IC55.14 R164.1 U$55.P$4
D246: IC55.13 U$55.P$3
D247: IC55.12
D248: IC55.11
D249: IC55.32 U$55.P$8
D250: IC55.1 R163.1 S28.1
D251: IC55.10
D252: IC55.9
D289: IC65.2
D290: IC65.14 R194.1 U$65.P$4
D291: IC65.13 U$65.P$3
D292: IC65.12
D293: IC65.11
D294: IC65.32 U$65.P$8
D295: IC65.1 R193.1 S33.1
D296: IC65.10
D297: IC65.9
D298: IC67.2
D299: IC67.14 R200.1 U$67.P$4
D300: IC67.13 U$67.P$3
D301: IC67.12
D302: IC67.11
D303: IC67.32 U$67.P$8
D304: IC67.1 R199.1 S34.1
D305: IC67.10
D306: IC67.9
D307: IC69.2
D308: IC69.14 R206.1 U$69.P$4
D309: IC69.13 U$69.P$3
D310: IC69.12
D311: IC69.11
D312: IC69.32 U$69.P$8
D313: IC69.1 R205.1 S35.1
D314: IC69.10
D315: IC69.9
D316: IC71.2
D317: IC71.14 R212.1 U$71.P$4
D318: IC71.13 U$71.P$3
D319: IC71.12
D320: IC71.11
D321: IC71.32 U$71.P$8
D322: IC71.1 R211.1 S36.1
D323: IC71.10
D324: IC71.9
D325: IC73.2
D326: IC73.14 R218.1 U$73.P$4
D327: IC73.13 U$73.P$3
D328: IC73.12
D329: IC73.11
D330: IC73.32 U$73.P$8
D331: IC73.1 R217.1 S37.1
D332: IC73.10
D333: IC73.9
D334: IC75.2
D335: IC75.14 R224.1 U$75.P$4
D336: IC75.13 U$75.P$3
D337: IC75.12
D338: IC75.11
D339: IC75.32 U$75.P$8
D340: IC75.1 R223.1 S38.1
D341: IC75.10
D342: IC75.9
GND [Power]: C1.2 C2.2 C7.1 IC1.3 IC1.5 IC1.21 IC4.3 R1.1 S1.2 TP1.TP U$1.P$2 U$2.P$6
GND1 [Power]: C3.2 C4.2 C5.1 IC2.3 IC2.5 IC2.21 IC3.3 R10.1 S2.2 TP3.TP U$3.P$2 U$4.P$6
GND2 [Power]: C6.2 C8.2 C9.1 IC5.3 IC5.5 IC5.21 IC6.3 R16.1 S3.2 TP5.TP U$5.P$2 U$6.P$6
GND3 [Power]: C10.2 C11.2 C12.1 IC7.3 IC7.5 IC7.21 IC8.3 R22.1 S4.2 TP7.TP U$7.P$2 U$8.P$6
GND4 [Power]: C13.2 C14.2 C15.1 IC9.3 IC9.5 IC9.21 IC10.3 R28.1 S5.2 TP9.TP U$9.P$2 U$10.P$6
GND5 [Power]: C16.2 C17.2 C18.1 IC11.3 IC11.5 IC11.21 IC12.3 R34.1 S6.2 TP11.TP U$11.P$2 U$12.P$6
GND6 [Power]: C19.2 C20.2 C21.1 IC13.3 IC13.5 IC13.21 IC14.3 R40.1 S7.2 TP13.TP U$13.P$2 U$14.P$6
GND7 [Power]: C22.2 C23.2 C24.1 IC15.3 IC15.5 IC15.21 IC16.3 R46.1 S8.2 TP15.TP U$15.P$2 U$16.P$6
GND8 [Power]: C25.2 C26.2 C27.1 IC17.3 IC17.5 IC17.21 IC18.3 R52.1 S9.2 TP17.TP U$17.P$2 U$18.P$6
GND9 [Power]: C28.2 C29.2 C30.1 IC19.3 IC19.5 IC19.21 IC20.3 R58.1 S10.2 TP19.TP U$19.P$2 U$20.P$6
GND10 [Power]: C31.2 C32.2 C33.1 IC21.3 IC21.5 IC21.21 IC22.3 R64.1 S11.2 TP21.TP U$21.P$2 U$22.P$6
GND11 [Power]: C34.2 C35.2 C36.1 IC23.3 IC23.5 IC23.21 IC24.3 R70.1 S12.2 TP23.TP U$23.P$2 U$24.P$6
GND16 [Power]: C49.2 C50.2 C51.1 IC33.3 IC33.5 IC33.21 IC34.3 R100.1 S17.2 TP33.TP U$33.P$2 U$34.P$6
GND17 [Power]: C52.2 C53.2 C54.1 IC35.3 IC35.5 IC35.21 IC36.3 R106.1 S18.2 TP35.TP U$35.P$2 U$36.P$6
GND18 [Power]: C55.2 C56.2 C57.1 IC37.3 IC37.5 IC37.21 IC38.3 R112.1 S19.2 TP37.TP U$37.P$2 U$38.P$6
GND19 [Power]: C58.2 C59.2 C60.1 IC39.3 IC39.5 IC39.21 IC40.3 R118.1 S20.2 TP39.TP U$39.P$2 U$40.P$6
GND20 [Power]: C61.2 C62.2 C63.1 IC41.3 IC41.5 IC41.21 IC42.3 R124.1 S21.2 TP41.TP U$41.P$2 U$42.P$6
GND21 [Power]: C64.2 C65.2 C66.1 IC43.3 IC43.5 IC43.21 IC44.3 R130.1 S22.2 TP43.TP U$43.P$2 U$44.P$6
GND22 [Power]: C67.2 C68.2 C69.1 IC45.3 IC45.5 IC45.21 IC46.3 R136.1 S23.2 TP45.TP U$45.P$2 U$46.P$6
GND23 [Power]: C70.2 C71.2 C72.1 IC47.3 IC47.5 IC47.21 IC48.3 R142.1 S24.2 TP47.TP U$47.P$2 U$48.P$6
GND24 [Power]: C73.2 C74.2 C75.1 IC49.3 IC49.5 IC49.21 IC50.3 R148.1 S25.2 TP49.TP U$49.P$2 U$50.P$6
GND25 [Power]: C76.2 C77.2 C78.1 IC51.3 IC51.5 IC51.21 IC52.3 R154.1 S26.2 TP51.TP U$51.P$2 U$52.P$6
GND26 [Power]: C79.2 C80.2 C81.1 IC53.3 IC53.5 IC53.21 IC54.3 R160.1 S27.2 TP53.TP U$53.P$2 U$54.P$6
GND27 [Power]: C82.2 C83.2 C84.1 IC55.3 IC55.5 IC55.21 IC56.3 R166.1 S28.2 TP55.TP U$55.P$2 U$56.P$6
GND32 [Power]: C97.2 C98.2 C99.1 IC65.3 IC65.5 IC65.21 IC66.3 R196.1 S33.2 TP65.TP U$65.P$2 U$66.P$6
GND33 [Power]: C100.2 C101.2 C102.1 IC67.3 IC67.5 IC67.21 IC68.3 R202.1 S34.2 TP67.TP U$67.P$2 U$68.P$6
GND34 [Power]: C103.2 C104.2 C105.1 IC69.3 IC69.5 IC69.21 IC70.3 R208.1 S35.2 TP69.TP U$69.P$2 U$70.P$6
GND35 [Power]: C106.2 C107.2 C108.1 IC71.3 IC71.5 IC71.21 IC72.3 R214.1 S36.2 TP71.TP U$71.P$2 U$72.P$6
GND36 [Power]: C109.2 C110.2 C111.1 IC73.3 IC73.5 IC73.21 IC74.3 R220.1 S37.2 TP73.TP U$73.P$2 U$74.P$6
GND37 [Power]: C112.2 C113.2 C114.1 IC75.3 IC75.5 IC75.21 IC76.3 R226.1 S38.2 TP75.TP U$75.P$2 U$76.P$6
MISO: IC1.16 U$1.P$7 U$2.P$1
MISO1: IC2.16 U$3.P$7 U$4.P$1
MISO2: IC5.16 U$5.P$7 U$6.P$1
MISO3: IC7.16 U$7.P$7 U$8.P$1
MISO4: IC9.16 U$9.P$7 U$10.P$1
MISO5: IC11.16 U$11.P$7 U$12.P$1
MISO6: IC13.16 U$13.P$7 U$14.P$1
MISO7: IC15.16 U$15.P$7 U$16.P$1
MISO8: IC17.16 U$17.P$7 U$18.P$1
MISO9: IC19.16 U$19.P$7 U$20.P$1
MISO10: IC21.16 U$21.P$7 U$22.P$1
MISO11: IC23.16 U$23.P$7 U$24.P$1
MISO16: IC33.16 U$33.P$7 U$34.P$1
MISO17: IC35.16 U$35.P$7 U$36.P$1
MISO18: IC37.16 U$37.P$7 U$38.P$1
MISO19: IC39.16 U$39.P$7 U$40.P$1
MISO20: IC41.16 U$41.P$7 U$42.P$1
MISO21: IC43.16 U$43.P$7 U$44.P$1
MISO22: IC45.16 U$45.P$7 U$46.P$1
MISO23: IC47.16 U$47.P$7 U$48.P$1
MISO24: IC49.16 U$49.P$7 U$50.P$1
MISO25: IC51.16 U$51.P$7 U$52.P$1
MISO26: IC53.16 U$53.P$7 U$54.P$1
MISO27: IC55.16 U$55.P$7 U$56.P$1
MISO32: IC65.16 U$65.P$7 U$66.P$1
MISO33: IC67.16 U$67.P$7 U$68.P$1
MISO34: IC69.16 U$69.P$7 U$70.P$1
MISO35: IC71.16 U$71.P$7 U$72.P$1
MISO36: IC73.16 U$73.P$7 U$74.P$1
MISO37: IC75.16 U$75.P$7 U$76.P$1
MOSI: IC1.15 U$1.P$6 U$2.P$4
MOSI1: IC2.15 U$3.P$6 U$4.P$4
MOSI2: IC5.15 U$5.P$6 U$6.P$4
MOSI3: IC7.15 U$7.P$6 U$8.P$4
MOSI4: IC9.15 U$9.P$6 U$10.P$4
MOSI5: IC11.15 U$11.P$6 U$12.P$4
MOSI6: IC13.15 U$13.P$6 U$14.P$4
MOSI7: IC15.15 U$15.P$6 U$16.P$4
MOSI8: IC17.15 U$17.P$6 U$18.P$4
MOSI9: IC19.15 U$19.P$6 U$20.P$4
MOSI10: IC21.15 U$21.P$6 U$22.P$4
MOSI11: IC23.15 U$23.P$6 U$24.P$4
MOSI16: IC33.15 U$33.P$6 U$34.P$4
MOSI17: IC35.15 U$35.P$6 U$36.P$4
MOSI18: IC37.15 U$37.P$6 U$38.P$4
MOSI19: IC39.15 U$39.P$6 U$40.P$4
MOSI20: IC41.15 U$41.P$6 U$42.P$4
MOSI21: IC43.15 U$43.P$6 U$44.P$4
MOSI22: IC45.15 U$45.P$6 U$46.P$4
MOSI23: IC47.15 U$47.P$6 U$48.P$4
MOSI24: IC49.15 U$49.P$6 U$50.P$4
MOSI25: IC51.15 U$51.P$6 U$52.P$4
MOSI26: IC53.15 U$53.P$6 U$54.P$4
MOSI27: IC55.15 U$55.P$6 U$56.P$4
MOSI32: IC65.15 U$65.P$6 U$66.P$4
MOSI33: IC67.15 U$67.P$6 U$68.P$4
MOSI34: IC69.15 U$69.P$6 U$70.P$4
MOSI35: IC71.15 U$71.P$6 U$72.P$4
MOSI36: IC73.15 U$73.P$6 U$74.P$4
MOSI37: IC75.15 U$75.P$6 U$76.P$4
N$1: C4.1 IC2.20
N$2: Q1.3 R3.2
N$3: Q2.3 R11.2
N$4: C2.1 IC1.20
N$5: C8.1 IC5.20
N$6: Q3.3 R17.2
N$7: C11.1 IC7.20
N$8: Q4.3 R23.2
N$9: C14.1 IC9.20
N$10: Q5.3 R29.2
N$11: C17.1 IC11.20
N$12: Q6.3 R35.2
N$13: C20.1 IC13.20
N$14: Q7.3 R41.2
N$15: C23.1 IC15.20
N$16: Q8.3 R47.2
N$17: C26.1 IC17.20
N$18: Q9.3 R53.2
N$19: C29.1 IC19.20
N$20: Q10.3 R59.2
N$21: C32.1 IC21.20
N$22: Q11.3 R65.2
N$23: C35.1 IC23.20
N$24: Q12.3 R71.2
N$33: C50.1 IC33.20
N$34: Q17.3 R101.2
N$35: C53.1 IC35.20
N$36: Q18.3 R107.2
N$37: C56.1 IC37.20
N$38: Q19.3 R113.2
N$39: C59.1 IC39.20
N$40: Q20.3 R119.2
N$41: C62.1 IC41.20
N$42: Q21.3 R125.2
N$43: C65.1 IC43.20
N$44: Q22.3 R131.2
N$45: C68.1 IC45.20
N$46: Q23.3 R137.2
N$47: C71.1 IC47.20
N$48: Q24.3 R143.2
N$49: C74.1 IC49.20
N$50: Q25.3 R149.2
N$51: C77.1 IC51.20
N$52: Q26.3 R155.2
N$53: C80.1 IC53.20
N$54: Q27.3 R161.2
N$55: C83.1 IC55.20
N$56: Q28.3 R167.2
N$65: C98.1 IC65.20
N$66: Q33.3 R197.2
N$67: C101.1 IC67.20
N$68: Q34.3 R203.2
N$69: C104.1 IC69.20
N$70: Q35.3 R209.2
N$71: C107.1 IC71.20
N$72: Q36.3 R215.2
N$73: C110.1 IC73.20
N$74: Q37.3 R221.2
N$75: C113.1 IC75.20
N$76: Q38.3 R227.2
RST: IC1.29 R5.1 U$2.P$5
RST1: IC2.29 R9.1 U$4.P$5
RST2: IC5.29 R15.1 U$6.P$5
RST3: IC7.29 R21.1 U$8.P$5
RST4: IC9.29 R27.1 U$10.P$5
RST5: IC11.29 R33.1 U$12.P$5
RST6: IC13.29 R39.1 U$14.P$5
RST7: IC15.29 R45.1 U$16.P$5
RST8: IC17.29 R51.1 U$18.P$5
RST9: IC19.29 R57.1 U$20.P$5
RST10: IC21.29 R63.1 U$22.P$5
RST11: IC23.29 R69.1 U$24.P$5
RST16: IC33.29 R99.1 U$34.P$5
RST17: IC35.29 R105.1 U$36.P$5
RST18: IC37.29 R111.1 U$38.P$5
RST19: IC39.29 R117.1 U$40.P$5
RST20: IC41.29 R123.1 U$42.P$5
RST21: IC43.29 R129.1 U$44.P$5
RST22: IC45.29 R135.1 U$46.P$5
RST23: IC47.29 R141.1 U$48.P$5
RST24: IC49.29 R147.1 U$50.P$5
RST25: IC51.29 R153.1 U$52.P$5
RST26: IC53.29 R159.1 U$54.P$5
RST27: IC55.29 R165.1 U$56.P$5
RST32: IC65.29 R195.1 U$66.P$5
RST33: IC67.29 R201.1 U$68.P$5
RST34: IC69.29 R207.1 U$70.P$5
RST35: IC71.29 R213.1 U$72.P$5
RST36: IC73.29 R219.1 U$74.P$5
RST37: IC75.29 R225.1 U$76.P$5
RXD: IC1.30
RXD1: IC2.30
RXD2: IC5.30
RXD3: IC7.30
RXD4: IC9.30
RXD5: IC11.30
RXD6: IC13.30
RXD7: IC15.30
RXD8: IC17.30
RXD9: IC19.30
RXD10: IC21.30
RXD11: IC23.30
RXD16: IC33.30
RXD17: IC35.30
RXD18: IC37.30
RXD19: IC39.30
RXD20: IC41.30
RXD21: IC43.30
RXD22: IC45.30
RXD23: IC47.30
RXD24: IC49.30
RXD25: IC51.30
RXD26: IC53.30
RXD27: IC55.30
RXD32: IC65.30
RXD33: IC67.30
RXD34: IC69.30
RXD35: IC71.30
RXD36: IC73.30
RXD37: IC75.30
SCK: IC1.17 U$1.P$5 U$2.P$3
SCK1: IC2.17 U$3.P$5 U$4.P$3
SCK2: IC5.17 U$5.P$5 U$6.P$3
SCK3: IC7.17 U$7.P$5 U$8.P$3
SCK4: IC9.17 U$9.P$5 U$10.P$3
SCK5: IC11.17 U$11.P$5 U$12.P$3
SCK6: IC13.17 U$13.P$5 U$14.P$3
SCK7: IC15.17 U$15.P$5 U$16.P$3
SCK8: IC17.17 U$17.P$5 U$18.P$3
SCK9: IC19.17 U$19.P$5 U$20.P$3
SCK10: IC21.17 U$21.P$5 U$22.P$3
SCK11: IC23.17 U$23.P$5 U$24.P$3
SCK16: IC33.17 U$33.P$5 U$34.P$3
SCK17: IC35.17 U$35.P$5 U$36.P$3
SCK18: IC37.17 U$37.P$5 U$38.P$3
SCK19: IC39.17 U$39.P$5 U$40.P$3
SCK20: IC41.17 U$41.P$5 U$42.P$3
SCK21: IC43.17 U$43.P$5 U$44.P$3
SCK22: IC45.17 U$45.P$5 U$46.P$3
SCK23: IC47.17 U$47.P$5 U$48.P$3
SCK24: IC49.17 U$49.P$5 U$50.P$3
SCK25: IC51.17 U$51.P$5 U$52.P$3
SCK26: IC53.17 U$53.P$5 U$54.P$3
SCK27: IC55.17 U$55.P$5 U$56.P$3
SCK32: IC65.17 U$65.P$5 U$66.P$3
SCK33: IC67.17 U$67.P$5 U$68.P$3
SCK34: IC69.17 U$69.P$5 U$70.P$3
SCK35: IC71.17 U$71.P$5 U$72.P$3
SCK36: IC73.17 U$73.P$5 U$74.P$3
SCK37: IC75.17 U$75.P$5 U$76.P$3
SCL: IC1.28
SCL1: IC2.28
SCL2: IC5.28
SCL3: IC7.28
SCL4: IC9.28
SCL5: IC11.28
SCL6: IC13.28
SCL7: IC15.28
SCL8: IC17.28
SCL9: IC19.28
SCL10: IC21.28
SCL11: IC23.28
SCL16: IC33.28
SCL17: IC35.28
SCL18: IC37.28
SCL19: IC39.28
SCL20: IC41.28
SCL21: IC43.28
SCL22: IC45.28
SCL23: IC47.28
SCL24: IC49.28
SCL25: IC51.28
SCL26: IC53.28
SCL27: IC55.28
SCL32: IC65.28
SCL33: IC67.28
SCL34: IC69.28
SCL35: IC71.28
SCL36: IC73.28
SCL37: IC75.28
SDA: IC1.27
SDA1: IC2.27
SDA2: IC5.27
SDA3: IC7.27
SDA4: IC9.27
SDA5: IC11.27
SDA6: IC13.27
SDA7: IC15.27
SDA8: IC17.27
SDA9: IC19.27
SDA10: IC21.27
SDA11: IC23.27
SDA16: IC33.27
SDA17: IC35.27
SDA18: IC37.27
SDA19: IC39.27
SDA20: IC41.27
SDA21: IC43.27
SDA22: IC45.27
SDA23: IC47.27
SDA24: IC49.27
SDA25: IC51.27
SDA26: IC53.27
SDA27: IC55.27
SDA32: IC65.27
SDA33: IC67.27
SDA34: IC69.27
SDA35: IC71.27
SDA36: IC73.27
SDA37: IC75.27
TXD: IC1.31
TXD1: IC2.31
TXD2: IC5.31
TXD3: IC7.31
TXD4: IC9.31
TXD5: IC11.31
TXD6: IC13.31
TXD7: IC15.31
TXD8: IC17.31
TXD9: IC19.31
TXD10: IC21.31
TXD11: IC23.31
TXD16: IC33.31
TXD17: IC35.31
TXD18: IC37.31
TXD19: IC39.31
TXD20: IC41.31
TXD21: IC43.31
TXD22: IC45.31
TXD23: IC47.31
TXD24: IC49.31
TXD25: IC51.31
TXD26: IC53.31
TXD27: IC55.31
TXD32: IC65.31
TXD33: IC67.31
TXD34: IC69.31
TXD35: IC71.31
TXD36: IC73.31
TXD37: IC75.31
VCC [Power]: C1.1 C7.2 IC1.4 IC1.6 IC1.18 IC4.2 Q1.2 R2.2 R4.2 R5.2 R6.2 TP2.TP U$1.P$1 U$2.P$2
VCC1 [Power]: C3.1 C5.2 IC2.4 IC2.6 IC2.18 IC3.2 Q2.2 R7.2 R8.2 R9.2 R12.2 TP4.TP U$3.P$1 U$4.P$2
VCC2 [Power]: C6.1 C9.2 IC5.4 IC5.6 IC5.18 IC6.2 Q3.2 R13.2 R14.2 R15.2 R18.2 TP6.TP U$5.P$1 U$6.P$2
VCC3 [Power]: C10.1 C12.2 IC7.4 IC7.6 IC7.18 IC8.2 Q4.2 R19.2 R20.2 R21.2 R24.2 TP8.TP U$7.P$1 U$8.P$2
VCC4 [Power]: C13.1 C15.2 IC9.4 IC9.6 IC9.18 IC10.2 Q5.2 R25.2 R26.2 R27.2 R30.2 TP10.TP U$9.P$1 U$10.P$2
VCC5 [Power]: C16.1 C18.2 IC11.4 IC11.6 IC11.18 IC12.2 Q6.2 R31.2 R32.2 R33.2 R36.2 TP12.TP U$11.P$1 U$12.P$2
VCC6 [Power]: C19.1 C21.2 IC13.4 IC13.6 IC13.18 IC14.2 Q7.2 R37.2 R38.2 R39.2 R42.2 TP14.TP U$13.P$1 U$14.P$2
VCC7 [Power]: C22.1 C24.2 IC15.4 IC15.6 IC15.18 IC16.2 Q8.2 R43.2 R44.2 R45.2 R48.2 TP16.TP U$15.P$1 U$16.P$2
VCC8 [Power]: C25.1 C27.2 IC17.4 IC17.6 IC17.18 IC18.2 Q9.2 R49.2 R50.2 R51.2 R54.2 TP18.TP U$17.P$1 U$18.P$2
VCC9 [Power]: C28.1 C30.2 IC19.4 IC19.6 IC19.18 IC20.2 Q10.2 R55.2 R56.2 R57.2 R60.2 TP20.TP U$19.P$1 U$20.P$2
VCC10 [Power]: C31.1 C33.2 IC21.4 IC21.6 IC21.18 IC22.2 Q11.2 R61.2 R62.2 R63.2 R66.2 TP22.TP U$21.P$1 U$22.P$2
VCC11 [Power]: C34.1 C36.2 IC23.4 IC23.6 IC23.18 IC24.2 Q12.2 R67.2 R68.2 R69.2 R72.2 TP24.TP U$23.P$1 U$24.P$2
VCC16 [Power]: C49.1 C51.2 IC33.4 IC33.6 IC33.18 IC34.2 Q17.2 R97.2 R98.2 R99.2 R102.2 TP34.TP U$33.P$1 U$34.P$2
VCC17 [Power]: C52.1 C54.2 IC35.4 IC35.6 IC35.18 IC36.2 Q18.2 R103.2 R104.2 R105.2 R108.2 TP36.TP U$35.P$1 U$36.P$2
VCC18 [Power]: C55.1 C57.2 IC37.4 IC37.6 IC37.18 IC38.2 Q19.2 R109.2 R110.2 R111.2 R114.2 TP38.TP U$37.P$1 U$38.P$2
VCC19 [Power]: C58.1 C60.2 IC39.4 IC39.6 IC39.18 IC40.2 Q20.2 R115.2 R116.2 R117.2 R120.2 TP40.TP U$39.P$1 U$40.P$2
VCC20 [Power]: C61.1 C63.2 IC41.4 IC41.6 IC41.18 IC42.2 Q21.2 R121.2 R122.2 R123.2 R126.2 TP42.TP U$41.P$1 U$42.P$2
VCC21 [Power]: C64.1 C66.2 IC43.4 IC43.6 IC43.18 IC44.2 Q22.2 R127.2 R128.2 R129.2 R132.2 TP44.TP U$43.P$1 U$44.P$2
VCC22 [Power]: C67.1 C69.2 IC45.4 IC45.6 IC45.18 IC46.2 Q23.2 R133.2 R134.2 R135.2 R138.2 TP46.TP U$45.P$1 U$46.P$2
VCC23 [Power]: C70.1 C72.2 IC47.4 IC47.6 IC47.18 IC48.2 Q24.2 R139.2 R140.2 R141.2 R144.2 TP48.TP U$47.P$1 U$48.P$2
VCC24 [Power]: C73.1 C75.2 IC49.4 IC49.6 IC49.18 IC50.2 Q25.2 R145.2 R146.2 R147.2 R150.2 TP50.TP U$49.P$1 U$50.P$2
VCC25 [Power]: C76.1 C78.2 IC51.4 IC51.6 IC51.18 IC52.2 Q26.2 R151.2 R152.2 R153.2 R156.2 TP52.TP U$51.P$1 U$52.P$2
VCC26 [Power]: C79.1 C81.2 IC53.4 IC53.6 IC53.18 IC54.2 Q27.2 R157.2 R158.2 R159.2 R162.2 TP54.TP U$53.P$1 U$54.P$2
VCC27 [Power]: C82.1 C84.2 IC55.4 IC55.6 IC55.18 IC56.2 Q28.2 R163.2 R164.2 R165.2 R168.2 TP56.TP U$55.P$1 U$56.P$2
VCC32 [Power]: C97.1 C99.2 IC65.4 IC65.6 IC65.18 IC66.2 Q33.2 R193.2 R194.2 R195.2 R198.2 TP66.TP U$65.P$1 U$66.P$2
VCC33 [Power]: C100.1 C102.2 IC67.4 IC67.6 IC67.18 IC68.2 Q34.2 R199.2 R200.2 R201.2 R204.2 TP68.TP U$67.P$1 U$68.P$2
VCC34 [Power]: C103.1 C105.2 IC69.4 IC69.6 IC69.18 IC70.2 Q35.2 R205.2 R206.2 R207.2 R210.2 TP70.TP U$69.P$1 U$70.P$2
VCC35 [Power]: C106.1 C108.2 IC71.4 IC71.6 IC71.18 IC72.2 Q36.2 R211.2 R212.2 R213.2 R216.2 TP72.TP U$71.P$1 U$72.P$2
VCC36 [Power]: C109.1 C111.2 IC73.4 IC73.6 IC73.18 IC74.2 Q37.2 R217.2 R218.2 R219.2 R222.2 TP74.TP U$73.P$1 U$74.P$2
VCC37 [Power]: C112.1 C114.2 IC75.4 IC75.6 IC75.18 IC76.2 Q38.2 R223.2 R224.2 R225.2 R228.2 TP76.TP U$75.P$1 U$76.P$2

## Tracks (layer width: path | path; a pad name or v marks a point on that pad's centre or on a via)
A0  (via drill 0.5)
  Top 0.406: R3.1 R1.2 12.59,5.95 v12.95,6.22 | v11.43,12.32 10.16,12.32 IC1.23
  Bottom 0.406: v12.95,6.22 12.95,10.79 v11.43,12.32
A1
  Top 0.305: Q1.1 12.32,9.73 12.19,9.91 12.2,13.21
  Top 0.406: R6.1 11.95,13.6 12.2,13.21 IC1.24
A3
  Top 0.406: IC4.1 12.03,15.58 10.92,14.48 10.03,14.48 9.02,13.46 8.38,13.46 8,13.84 8,14.66 IC1.26
A4  (via drill 0.5)
  Top 0.406: R11.1 R10.2 27.59,5.95 v27.95,6.22 | v26.43,12.32 25.16,12.32 IC2.23
  Bottom 0.406: v27.95,6.22 27.95,10.79 v26.43,12.32
A5
  Top 0.305: Q2.1 27.32,9.73 27.19,9.91 27.2,13.21
  Top 0.406: R12.1 26.95,13.6 27.2,13.21 IC2.24
A7
  Top 0.406: IC3.1 27.03,15.58 25.92,14.48 25.03,14.48 24.02,13.46 23.38,13.46 23,13.84 23,14.66 IC2.26
A8  (via drill 0.5)
  Top 0.406: R17.1 R16.2 12.59,25.95 v12.95,26.22 | v11.43,32.32 10.16,32.32 IC5.23
  Bottom 0.406: v12.95,26.22 12.95,30.8 v11.43,32.32
A9
  Top 0.305: Q3.1 12.32,29.73 12.19,29.91 12.2,33.21
  Top 0.406: R18.1 11.95,33.6 12.2,33.21 IC5.24
A11
  Top 0.406: IC6.1 12.03,35.58 10.92,34.48 10.03,34.48 9.02,33.46 8.38,33.46 8,33.84 8,34.66 IC5.26
A12  (via drill 0.5)
  Top 0.406: R23.1 R22.2 27.59,25.95 v27.95,26.22 | v26.43,32.32 25.16,32.32 IC7.23
  Bottom 0.406: v27.95,26.22 27.95,30.8 v26.43,32.32
A13
  Top 0.305: Q4.1 27.32,29.73 27.19,29.91 27.2,33.21
  Top 0.406: R24.1 26.95,33.6 27.2,33.21 IC7.24
A15
  Top 0.406: IC8.1 27.03,35.58 25.92,34.48 25.03,34.48 24.02,33.46 23.38,33.46 23,33.84 23,34.66 IC7.26
A16  (via drill 0.5)
  Top 0.406: R29.1 R28.2 42.59,5.95 v42.95,6.22 | v41.43,12.32 40.16,12.32 IC9.23
  Bottom 0.406: v42.95,6.22 42.95,10.79 v41.43,12.32
A17
  Top 0.305: Q5.1 42.32,9.73 42.19,9.91 42.2,13.21
  Top 0.406: R30.1 41.95,13.6 42.2,13.21 IC9.24
A19
  Top 0.406: IC10.1 42.03,15.58 40.92,14.48 40.03,14.48 39.02,13.46 38.38,13.46 38,13.84 38,14.66 IC9.26
A20  (via drill 0.5)
  Top 0.406: R35.1 R34.2 57.59,5.95 v57.95,6.22 | v56.43,12.32 55.16,12.32 IC11.23
  Bottom 0.406: v57.95,6.22 57.95,10.79 v56.43,12.32
A21
  Top 0.305: Q6.1 57.32,9.73 57.19,9.91 57.2,13.21
  Top 0.406: R36.1 56.95,13.6 57.2,13.21 IC11.24
A23
  Top 0.406: IC12.1 57.03,15.58 55.92,14.48 55.03,14.48 54.02,13.46 53.38,13.46 53,13.84 53,14.66 IC11.26
A24  (via drill 0.5)
  Top 0.406: R41.1 R40.2 42.59,25.95 v42.95,26.22 | v41.43,32.32 40.16,32.32 IC13.23
  Bottom 0.406: v42.95,26.22 42.95,30.8 v41.43,32.32
A25
  Top 0.305: Q7.1 42.32,29.73 42.19,29.91 42.2,33.21
  Top 0.406: R42.1 41.95,33.6 42.2,33.21 IC13.24
A27
  Top 0.406: IC14.1 42.03,35.58 40.92,34.48 40.03,34.48 39.02,33.46 38.38,33.46 38,33.84 38,34.66 IC13.26
A28  (via drill 0.5)
  Top 0.406: R47.1 R46.2 57.59,25.95 v57.95,26.22 | v56.43,32.32 55.16,32.32 IC15.23
  Bottom 0.406: v57.95,26.22 57.95,30.8 v56.43,32.32
A29
  Top 0.305: Q8.1 57.32,29.73 57.19,29.91 57.2,33.21
  Top 0.406: R48.1 56.95,33.6 57.2,33.21 IC15.24
A31
  Top 0.406: IC16.1 57.03,35.58 55.92,34.48 55.03,34.48 54.02,33.46 53.38,33.46 53,33.84 53,34.66 IC15.26
A32  (via drill 0.5)
  Top 0.406: R53.1 R52.2 72.59,5.95 v72.95,6.22 | v71.43,12.32 70.16,12.32 IC17.23
  Bottom 0.406: v72.95,6.22 72.95,10.79 v71.43,12.32
A33
  Top 0.305: Q9.1 72.32,9.73 72.19,9.91 72.2,13.21
  Top 0.406: R54.1 71.95,13.6 72.2,13.21 IC17.24
A35
  Top 0.406: IC18.1 72.03,15.58 70.92,14.48 70.03,14.48 69.02,13.46 68.38,13.46 68,13.84 68,14.66 IC17.26
A36  (via drill 0.5)
  Top 0.406: R59.1 R58.2 87.59,5.95 v87.95,6.22 | v86.43,12.32 85.16,12.32 IC19.23
  Bottom 0.406: v87.95,6.22 87.95,10.79 v86.43,12.32
A37
  Top 0.305: Q10.1 87.32,9.73 87.19,9.91 87.2,13.21
  Top 0.406: R60.1 86.95,13.6 87.2,13.21 IC19.24
A39
  Top 0.406: IC20.1 87.03,15.58 85.92,14.48 85.03,14.48 84.02,13.46 83.38,13.46 83,13.84 83,14.66 IC19.26
A40  (via drill 0.5)
  Top 0.406: R65.1 R64.2 72.59,25.95 v72.95,26.22 | v71.43,32.32 70.16,32.32 IC21.23
  Bottom 0.406: v72.95,26.22 72.95,30.8 v71.43,32.32
A41
  Top 0.305: Q11.1 72.32,29.73 72.19,29.91 72.2,33.21
  Top 0.406: R66.1 71.95,33.6 72.2,33.21 IC21.24
A43
  Top 0.406: IC22.1 72.03,35.58 70.92,34.48 70.03,34.48 69.02,33.46 68.38,33.46 68,33.84 68,34.66 IC21.26
A44  (via drill 0.5)
  Top 0.406: R71.1 R70.2 87.59,25.95 v87.95,26.22 | v86.43,32.32 85.16,32.32 IC23.23
  Bottom 0.406: v87.95,26.22 87.95,30.8 v86.43,32.32
A45
  Top 0.305: Q12.1 87.32,29.73 87.19,29.91 87.2,33.21
  Top 0.406: R72.1 86.95,33.6 87.2,33.21 IC23.24
A47
  Top 0.406: IC24.1 87.03,35.58 85.92,34.48 85.03,34.48 84.02,33.46 83.38,33.46 83,33.84 83,34.66 IC23.26
A64  (via drill 0.5)
  Top 0.406: R101.1 R100.2 12.59,45.95 v12.95,46.22 | v11.43,52.32 10.16,52.32 IC33.23
  Bottom 0.406: v12.95,46.22 12.95,50.8 v11.43,52.32
A65
  Top 0.305: Q17.1 12.32,49.73 12.19,49.91 12.2,53.21
  Top 0.406: R102.1 11.95,53.6 12.2,53.21 IC33.24
A67
  Top 0.406: IC34.1 12.03,55.58 10.92,54.48 10.03,54.48 9.02,53.46 8.38,53.46 8,53.84 8,54.66 IC33.26
A68  (via drill 0.5)
  Top 0.406: R107.1 R106.2 27.59,45.95 v27.95,46.22 | v26.43,52.32 25.16,52.32 IC35.23
  Bottom 0.406: v27.95,46.22 27.95,50.8 v26.43,52.32
A69
  Top 0.305: Q18.1 27.32,49.73 27.19,49.91 27.2,53.21
  Top 0.406: R108.1 26.95,53.6 27.2,53.21 IC35.24
A71
  Top 0.406: IC36.1 27.03,55.58 25.92,54.48 25.03,54.48 24.02,53.46 23.38,53.46 23,53.84 23,54.66 IC35.26
A72  (via drill 0.5)
  Top 0.406: R113.1 R112.2 12.59,65.95 v12.95,66.22 | v11.43,72.32 10.16,72.32 IC37.23
  Bottom 0.406: v12.95,66.22 12.95,70.8 v11.43,72.32
A73
  Top 0.305: Q19.1 12.32,69.73 12.19,69.91 12.2,73.21
  Top 0.406: R114.1 11.95,73.6 12.2,73.21 IC37.24
A75
  Top 0.406: IC38.1 12.03,75.58 10.92,74.48 10.03,74.48 9.02,73.46 8.38,73.46 8,73.84 8,74.66 IC37.26
A76  (via drill 0.5)
  Top 0.406: R119.1 R118.2 27.59,65.95 v27.95,66.22 | v26.43,72.32 25.16,72.32 IC39.23
  Bottom 0.406: v27.95,66.22 27.95,70.8 v26.43,72.32
A77